# Altium PCB 56630 Rev A.PcbDoc
Units mm, origin at the board's own origin, x right, y up, seen from the top; angles counter-clockwise.
Board outline 36.35 x 21.65 mm, 2 copper layers (Top Layer, Bottom Layer), stack 1.571 mm thick; 5 components, 12 nets, 54 pads, 12 vias.
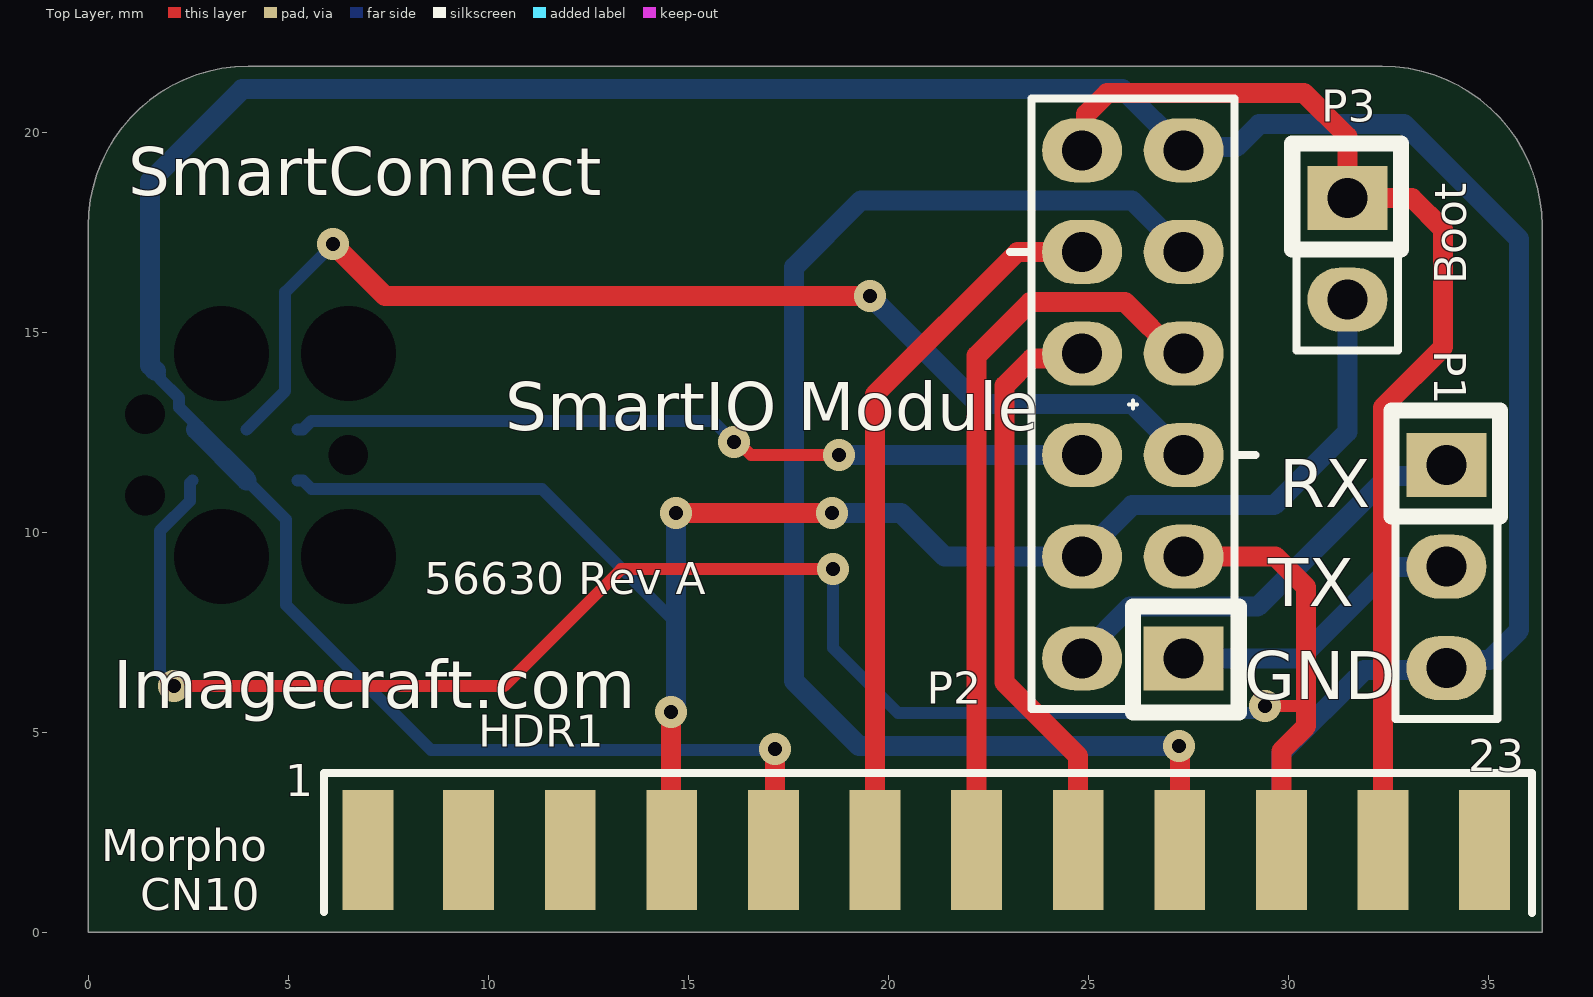
[diagram p0: Top Layer view]
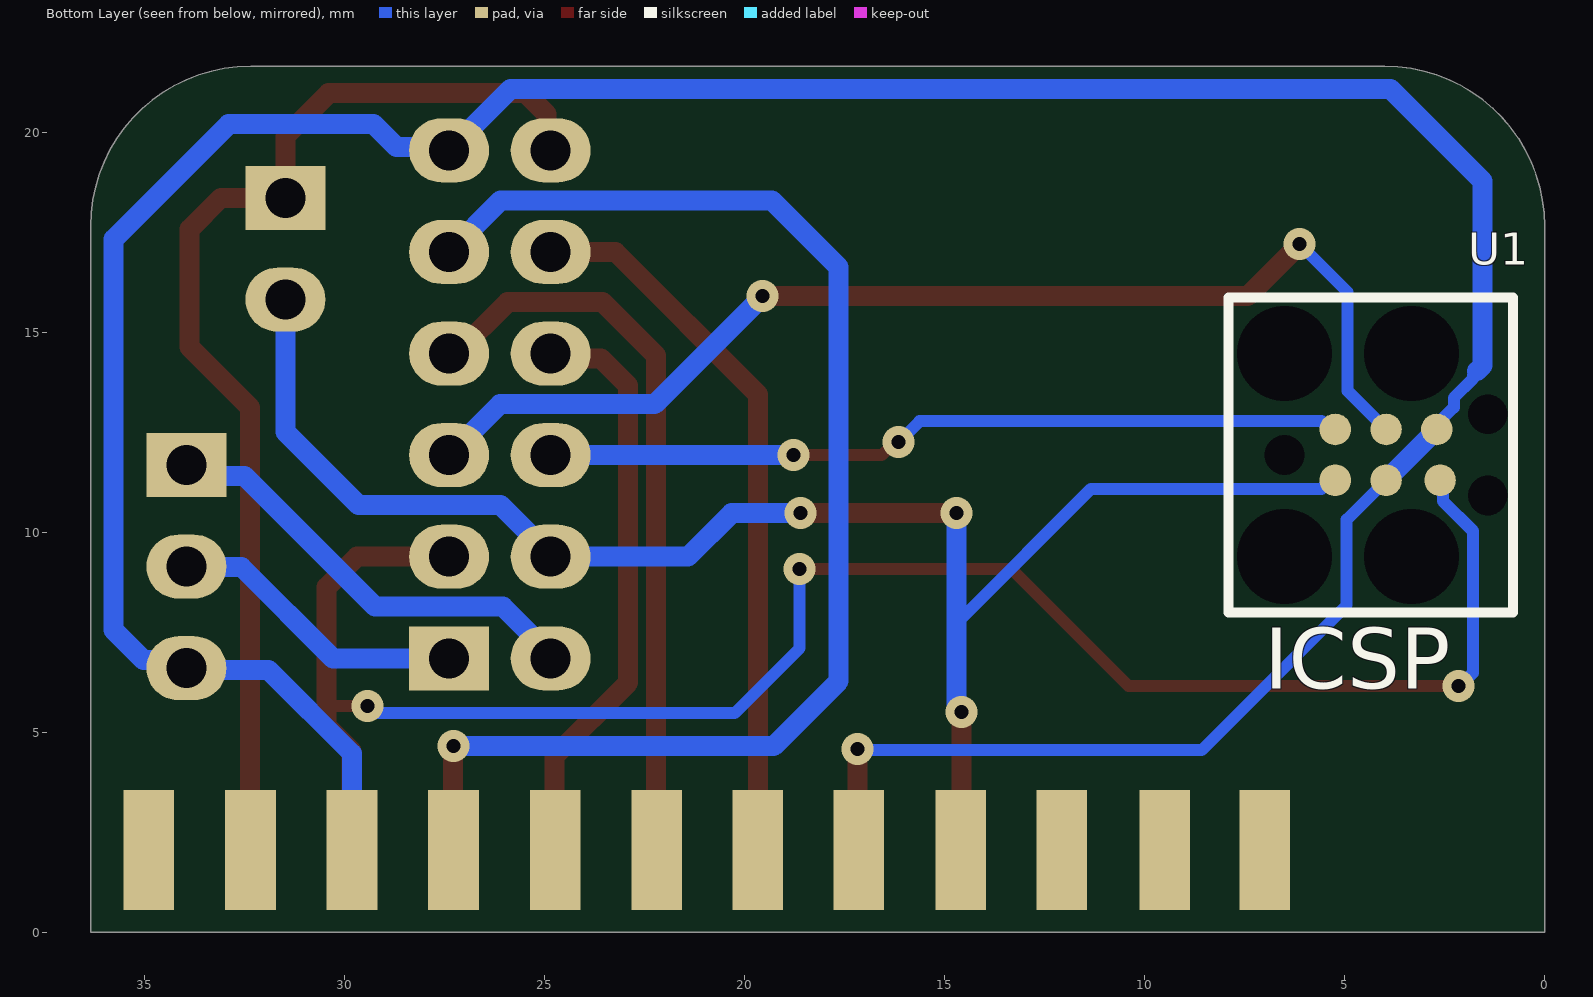
[diagram p1: Bottom Layer view, seen from below]
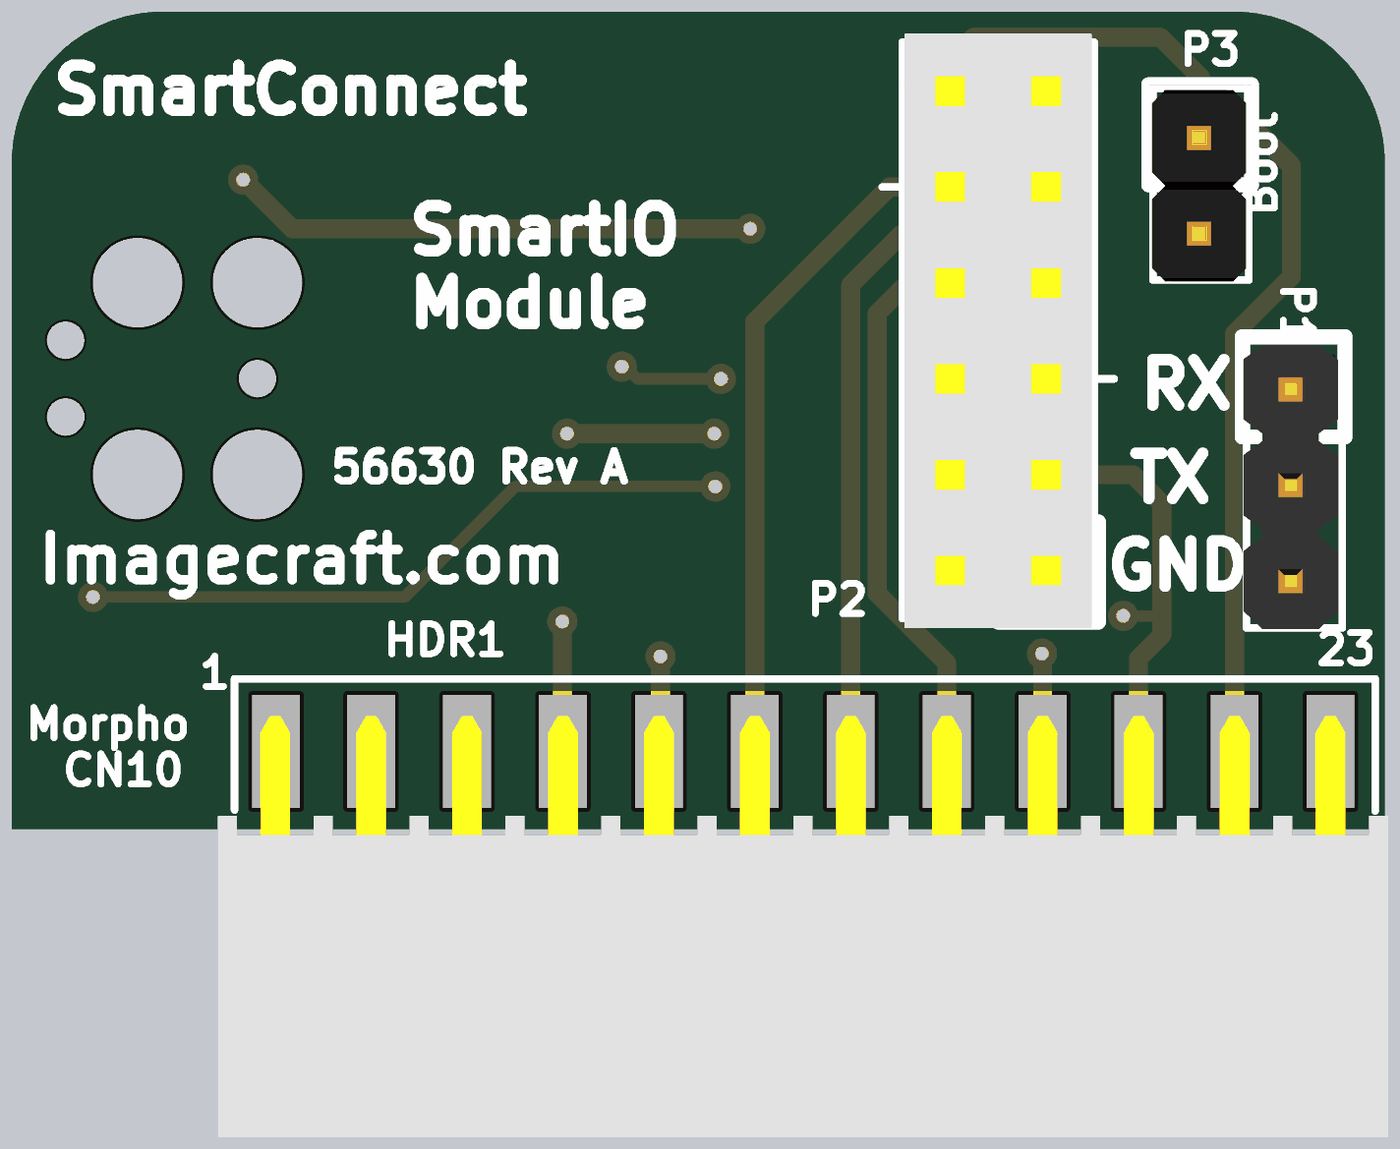
[diagram p2: 3D render of the assembled board from above, using the file's embedded part models]

## Layer stack, top to bottom
Top Solder: solder mask 0.0102, Solder Resist, Dk 3.5
Top Layer: signal copper 0.0356
Dielectric1: core 1.5, FR-4, Dk 4.8
Bottom Layer: signal copper 0.0356
Bottom Solder: solder mask 0.0102, Solder Resist, Dk 3.5

## Board outline
0,0 0,17.65 cw(c4,17.65) 4,21.65 32.35,21.65 cw(c32.35,17.65) 36.35,17.65 36.35,0

## Design rules (kind name [scope] priority, off if disabled: settings)
Clearance "Clearance Poly" [(InPolygon)] p1: gap=0.4 ignorepadtopadclearanceinfootprint=FALSE except(0: Arc-Hole Track-Hole SMDPad-Hole THPad-Hole Via-Hole Fill-Hole Poly-Hole Region-Hole Text-Hole)
Clearance [All] p2: gap=0.2 ignorepadtopadclearanceinfootprint=FALSE except(0: Arc-Hole Track-Hole SMDPad-Hole THPad-Hole Via-Hole Fill-Hole Poly-Hole Region-Hole Text-Hole)
FabricationTestPointUsage TestPointUsage [All] p1: valid=0 allowmultiple=FALSE
FabricationTestpoint Testpoint [All] p1: side=3 testpointundercomponent=TRUE minsize=1.016 maxsize=2.54 preferedsize=1.524 minholesize=0 maxholesize=1.016 preferedholesize=0.813 testpointgrid=0.025 allowsidetop=TRUE allowsidebottom=TRUE usegrid=TRUE gridtolerance=0
HoleSize [All] p1: absolutevalues=TRUE maxlimit=5 minlimit=0.025 maxpercent=80.000 minpercent=20.000
PolygonConnect [All] p1: connectstyle=Direct reliefconductorwidth=0.3 reliefentries=4 polygonreliefangle="90 Angle" airgapwidth=0.254
RoutingVias [All] p1: holewidth=0.8 width=1 viastyle="Through Hole" minholewidth=0.2 minwidth=0.6 maxholewidth=1 maxwidth=2
SilkToSolderMaskClearance SilkscreenOverComponentPads [IsPad] p1: minsilkscreentomaskgap=0.254 clearancetoexposedcopper=TRUE
SolderMaskExpansion [All] p1: expansion=0.102
Width [All] p1: maxlimit=5 minlimit=0.2 preferedwidth=0.3
26 further rules are at their usual default settings.

## Components (designator, comment, footprint, x,y, rotation, side; value= is the part's Value field where it differs from the comment)
HDR1 "2X12 PIN HDR" "PCB EDGE 12 x 2 2.54mm" 6.997,2.058 r0 top
P1 "3 Pin Header" HDR3-MT 33.958,11.679 r270 top
P2 "Socket 2x6" "HDR2X6 Female-Samtec" 26.118,13.196 r90 top
P3 "HEADER_2X1" HDR2-MT 31.482,18.354 r270 top
U1 "JLINK Port minimal" TC2030-IDC 6.504,11.933 r180 bottom

## Footprints (in the part's own frame and the unit in brackets; to place one, negate y for a bottom-side part, rotate by r counter-clockwise, add the part's x,y. Pads: shape width x height; smd on the part's side, far side on the other; paste and mask are expansions set on the pad)
HDR2-MT [mm]
  rect 1.6x2 hole 1: 1(0,0)
  oval 1.6x2 hole 1: 2(2.54,0)
  silkscreen extent -1.36,-1.38 3.81,1.34, body extent -1.22,-1.3 3.86,1.2, height 8.55
"HDR2X6 Female-Samtec" [mm] "SSW-106-01-F-D Samtec"
  rect 1.6x2 hole 1: 1(-6.35,-1.27)
  oval 1.6x2 hole 1: 2(-6.35,1.27) 3(-3.81,-1.27) 4(-3.81,1.27) 5(-1.27,-1.27) 6(-1.27,1.27) 7(1.27,-1.27) 8(1.27,1.27) 9(3.81,-1.27) 10(3.81,1.27) 11(6.35,-1.27) 12(6.35,1.27)
  silkscreen extent -7.71,-3.07 7.65,3.07, body extent -7.87,-2.48 7.87,2.48, height 8.51
HDR3-MT [mm]
  rect 1.6x2 hole 1: 1(0,0)
  oval 1.6x2 hole 1: 2(2.54,0) 3(5.08,0)
  silkscreen extent -1.36,-1.38 6.35,1.34, body extent -1.16,-1.35 6.38,1.15, height 8.2
"PCB EDGE 12 x 2 2.54mm" [mm]
  rect 1.27x3 smd: 1(0,0) 3(2.515,0) 5(5.055,0) 7(7.595,0) 9(10.135,0) 11(12.675,0) 13(15.215,0) 15(17.755,0) 17(20.295,0) 19(22.835,0) 21(25.375,0) 23(27.915,0)
  rect 1.27x3 smd far side: 2(0,0) 4(2.5,0) 6(5.075,0) 8(7.6,0) 10(10.15,0) 12(12.675,0) 14(15.2,0) 16(17.74,0) 18(20.28,0) 20(22.82,0) 22(25.36,0) 24(27.9,0)
  silkscreen extent -1.1,-1.58 29.1,1.92, body extent -1.55,-10.21 29.44,0.94, height 1.42
TC2030-IDC [mm] "Tag-Connect 6-Pin with Legs (PN# TC2030-IDC-NL)"
  round 2.3 hole 2.375 unplated: 0(0,-2.54) 0(0,2.54) 0(3.175,-2.54) 0(3.175,2.54)
  round 0.9 hole 0.995 unplated: 0(0,0) 0(5.08,-1.016) 0(5.08,1.016)
  round 0.79 smd paste-0.39: 1(1.27,-0.635) 2(1.27,0.635) 3(2.54,-0.635) 4(2.54,0.635) 5(3.89,-0.635) 6(3.81,0.635)
  silkscreen extent -1.4,-3.94 5.72,3.94

## Part data
HDR1: "HDR PLG 2X12 PINS Male", Part Number=SSW-112-01-F-D, Cost/Qty=$0.0775, Entry Date="Feb 2019", Supplier=Samtec
P1: library part "3 PIN HDR", "CONN HDR PLG GOLD SIL3 L=8.2mm", Part Number="205-140-003-103  (E-CAM)", Cost/Qty=$0.05, Entry Date=AUG2000
P2: library part "2X6 Female socket", "HDR PLG 2X6 PINS", Part Number=SSW-106-01-F-D, Cost/Qty=$0.16, Entry Date=JUL2006, Supplier=Samtec
P3: "2pin header single row, male, 2.54mm spacing", Part Number=???????, Cost/Qty=$0.03, Entry Date=AUG2000
U1: library part "JLINK ARM Debug PORT Tag-Connect 6 pin", Part Number="Generic 2 x 10 way header spaceing 0.1inch", Temp Range="TEMPERATURE RANGE", Cost / Qty="COST (QTY), COST (QTY)", Entry Date="Feb 2013"

## Via types
v1: diameter 0.8, hole 0.35, Top Layer to Bottom Layer, tented both sides, 12 vias

## Nets (pads, with @x,y where several pads share a name; then routed paths per layer and width w, separated by ;. In a path a pad name is that pad's centre, name@x,y a point inside that pad or via, vN(x,y) a via of type N, cw(c..) or ccw(c..) an arc to the next point about the centre after c; other vN are vias at no path point)
+3.3V: HDR1.7 P2.4 P3.2 U1.1 | length 41.1
  Top Layer w0.3: HDR1.7@14.575,2.075 HDR1.7
  Top Layer w0.5: HDR1.7@14.575,2.075 v1(14.575,5.5) ; v1(14.7,10.475) v1(18.6,10.475)
  Bottom Layer w0.3: U1.1 5.367,11.298 5.579,11.085 11.34,11.085 14.575,7.85
  Bottom Layer w0.5: v1(14.575,5.5) 14.575,5.581 14.7,5.706 v1(14.7,10.475) ; v1(18.6,10.475) 20.325,10.475 21.414,9.386 P2.4 24.848,9.423 26.1,10.675 29.65,10.675 31.482,12.507 P3.2
GND: HDR1.9 HDR1.20 P1.3 P2.11 U1.3 U1.6 | length 85.6
  Top Layer w0.3: HDR1.9 HDR1.9@17.175,2.101
  Top Layer w0.5: HDR1.9@17.175,2.101 v1(17.175,4.575)
  Bottom Layer w0.3: 1.692,14.025 1.792,13.925 1.792,13.836 2.272,13.356 2.272,13.123 2.694,12.7 U1.6 ; U1.3 4.95,10.312 4.95,8.175 8.575,4.55 17.15,4.55 v1(17.175,4.575)
  Bottom Layer w0.5: 1.692,14.025 1.55,14.167 1.55,18.775 3.85,21.075 25.859,21.075 P2.11 27.467,19.625 28.7,19.625 29.275,20.2 32.9,20.2 35.775,17.325 35.775,7.55 35.035,6.81 34.168,6.81 P1.3 ; U1.6 U1.3 ; HDR1.20 29.817,4.465 31.901,6.549 P1.3@34.583,6.549
RESET: HDR1.19 P2.3 U1.5 | length 48.1
  Top Layer w0.3: v1(2.15,6.15) 10.4,6.15 13.325,9.075 v1(18.625,9.075) ; v1(29.425,5.65) 30.425,5.65 30.45,5.625
  Top Layer w0.5: P2.3 29.689,9.386 30.45,8.625 30.45,5.625 30.45,5.15 29.832,4.532 HDR1.19
  Bottom Layer w0.3: v1(2.15,6.15) 2.125,6.15 1.792,6.483 1.792,10.03 2.54,10.777 2.54,11.223 U1.5 ; v1(18.625,9.075) 18.625,7.1 20.25,5.475 29.25,5.475 v1(29.425,5.65)
SPI1_CS: HDR1.17 P2.9 | length 34.2
  Top Layer w0.5: v1(27.275,4.65) 27.292,4.633 HDR1.17
  Bottom Layer w0.5: v1(27.275,4.65) 19.275,4.65 17.65,6.275 17.65,16.625 19.321,18.296 26.098,18.296 P2.9
SPI1_MISO: HDR1.13 P2.7 | length 18.6
  Top Layer w0.5: HDR1.13 22.212,14.412 23.55,15.75 25.925,15.75 27.209,14.466 P2.7
SPI1_MOSI: HDR1.15 P2.8 | length 14.6
  Top Layer w0.5: HDR1.15 24.752,4.398 22.912,6.238 22.912,13.662 23.586,14.336 24.718,14.336 P2.8
SPI1_SCK: HDR1.11 P2.10 | length 18
  Top Layer w0.5: HDR1.11 19.672,13.447 23.231,17.006 P2.10
SPI_IRQ: HDR1.21 P2.12 P3.1 | length 28.5
  Top Layer w0.5: P2.12 24.95,19.648 24.95,20.45 25.475,20.975 30.4,20.975 31.482,19.893 P3.1 33.096,18.354 33.875,17.575 33.875,14.625 32.372,13.122 HDR1.21
SWCLK: P2.5 U1.4 | length 29
  Top Layer w0.5: v1(6.125,17.2) 7.425,15.9 v1(19.55,15.9)
  Bottom Layer w0.3: U1.4 4.925,13.528 4.925,16 v1(6.125,17.2)
  Bottom Layer w0.5: v1(19.55,15.9) 22.25,13.2 26.114,13.2 P2.5
SWDIO: P2.6 U1.2 | length 20.1
  Top Layer w0.3: v1(16.15,12.25) 16.251,12.25 16.576,11.925 v1(18.775,11.925)
  Bottom Layer w0.3: U1.2 5.367,12.568 5.579,12.78 6.855,12.78 6.861,12.775 15.625,12.775 v1(16.15,12.25)
  Bottom Layer w0.5: v1(18.775,11.925) P2.6
USART_RX: P1.1 P2.2 | length 11.2
  Bottom Layer w0.5: P2.2 24.848,6.944 26.04,8.136 29.236,8.136 32.5,11.4 33.679,11.4 P1.1
USART_TX: P1.2 P2.1 | length 7.5
  Bottom Layer w0.5: P2.1 30.296,6.846 32.577,9.127 33.946,9.127 P1.2
pads on no net: HDR1.1 HDR1.2 HDR1.3 HDR1.4 HDR1.5 HDR1.6 HDR1.8 HDR1.10 HDR1.12 HDR1.14 HDR1.16 HDR1.18 HDR1.22 HDR1.23 HDR1.24 U1.0

## Silkscreen, mask and mechanical layers (free items; w line width, h text height)
Top Overlay:
  text "SmartConnect" at 1,18.425 h1.2
  text "Boot" at 34.45,16.2 h0.8 r90
  text "SmartIO Module" at 10.425,12.55 h1.2
  text "RX" at 29.775,10.625 h1.2
  text "56630 Rev A" at 8.4,8.45 h0.8
  text "TX" at 29.5,8.15 h1.2
  text "GND" at 28.9,5.825 h1.2
  text "Imagecraft.com" at 0.625,5.6 h1.2
  text "23" at 34.5,4.025 h0.8
  text "1" at 4.925,3.4 h0.8
  text "Morpho" at 0.325,1.775 h0.8
  text "CN10" at 1.3,0.55 h0.8
Mechanical 1:
  the board outline again, w0.2
Mechanical 4:
  drawing of 191 lines, arcs and shapes, not listed
  text "Layer" at 121.388,97.031 h1.52
  text "Name" at 131.799,97.031 h1.52
  text "Material" at 155.415,97.031 h1.52
  text "Thickness" at 177.253,97.031 h1.52
  text "Constant" at 193.759,97.031 h1.52
  text "Board Layer Stack" at 208.233,97.031 h1.52
  text "Top Overlay" at 131.799,93.983 h1.52
  text "Top Solder" at 131.799,90.935 h1.52
  text "Solder Resist" at 155.415,90.935 h1.52
  text "0.010mm" at 177.253,90.935 h1.52
  text "3.5" at 193.759,90.935 h1.52
  text "1" at 121.388,87.887 h1.52
  text "Top Layer" at 131.799,87.887 h1.52
  text "Copper" at 155.415,87.887 h1.52
  text "0.036mm" at 177.253,87.887 h1.52
  text "Dielectric1" at 131.799,84.839 h1.52
  text "FR-4" at 155.415,84.839 h1.52
  text "1.500mm" at 177.253,84.839 h1.52
  text "4.8" at 193.759,84.839 h1.52
  text "2" at 121.388,81.791 h1.52
  text "Bottom Layer" at 131.799,81.791 h1.52
  text "Copper" at 155.415,81.791 h1.52
  text "0.036mm" at 177.253,81.791 h1.52
  text "Bottom Solder" at 131.799,78.743 h1.52
  text "Solder Resist" at 155.415,78.743 h1.52
  text "0.010mm" at 177.253,78.743 h1.52
  text "3.5" at 193.759,78.743 h1.52
  text "Bottom Overlay" at 131.799,75.695 h1.52
  text "Solder mask Green / Overlay top White / Overlay bottom white / PCB finish HAL / Er not critical" at 135.2,49.75 h1.5

## Text inside footprints (layer, text, board x,y; h text height)
U1: Bottom Overlay "ICSP" at 7.012,6.091 h1.52